# Altium PCB Cc and Cv.PcbDoc
Units mm, origin at the board's own origin, x right, y up, seen from the top; angles counter-clockwise.
Board outline 79.76 x 79.76 mm, 2 copper layers (Top Layer, Bottom Layer); 21 components, 17 nets, 64 pads, 0 vias.
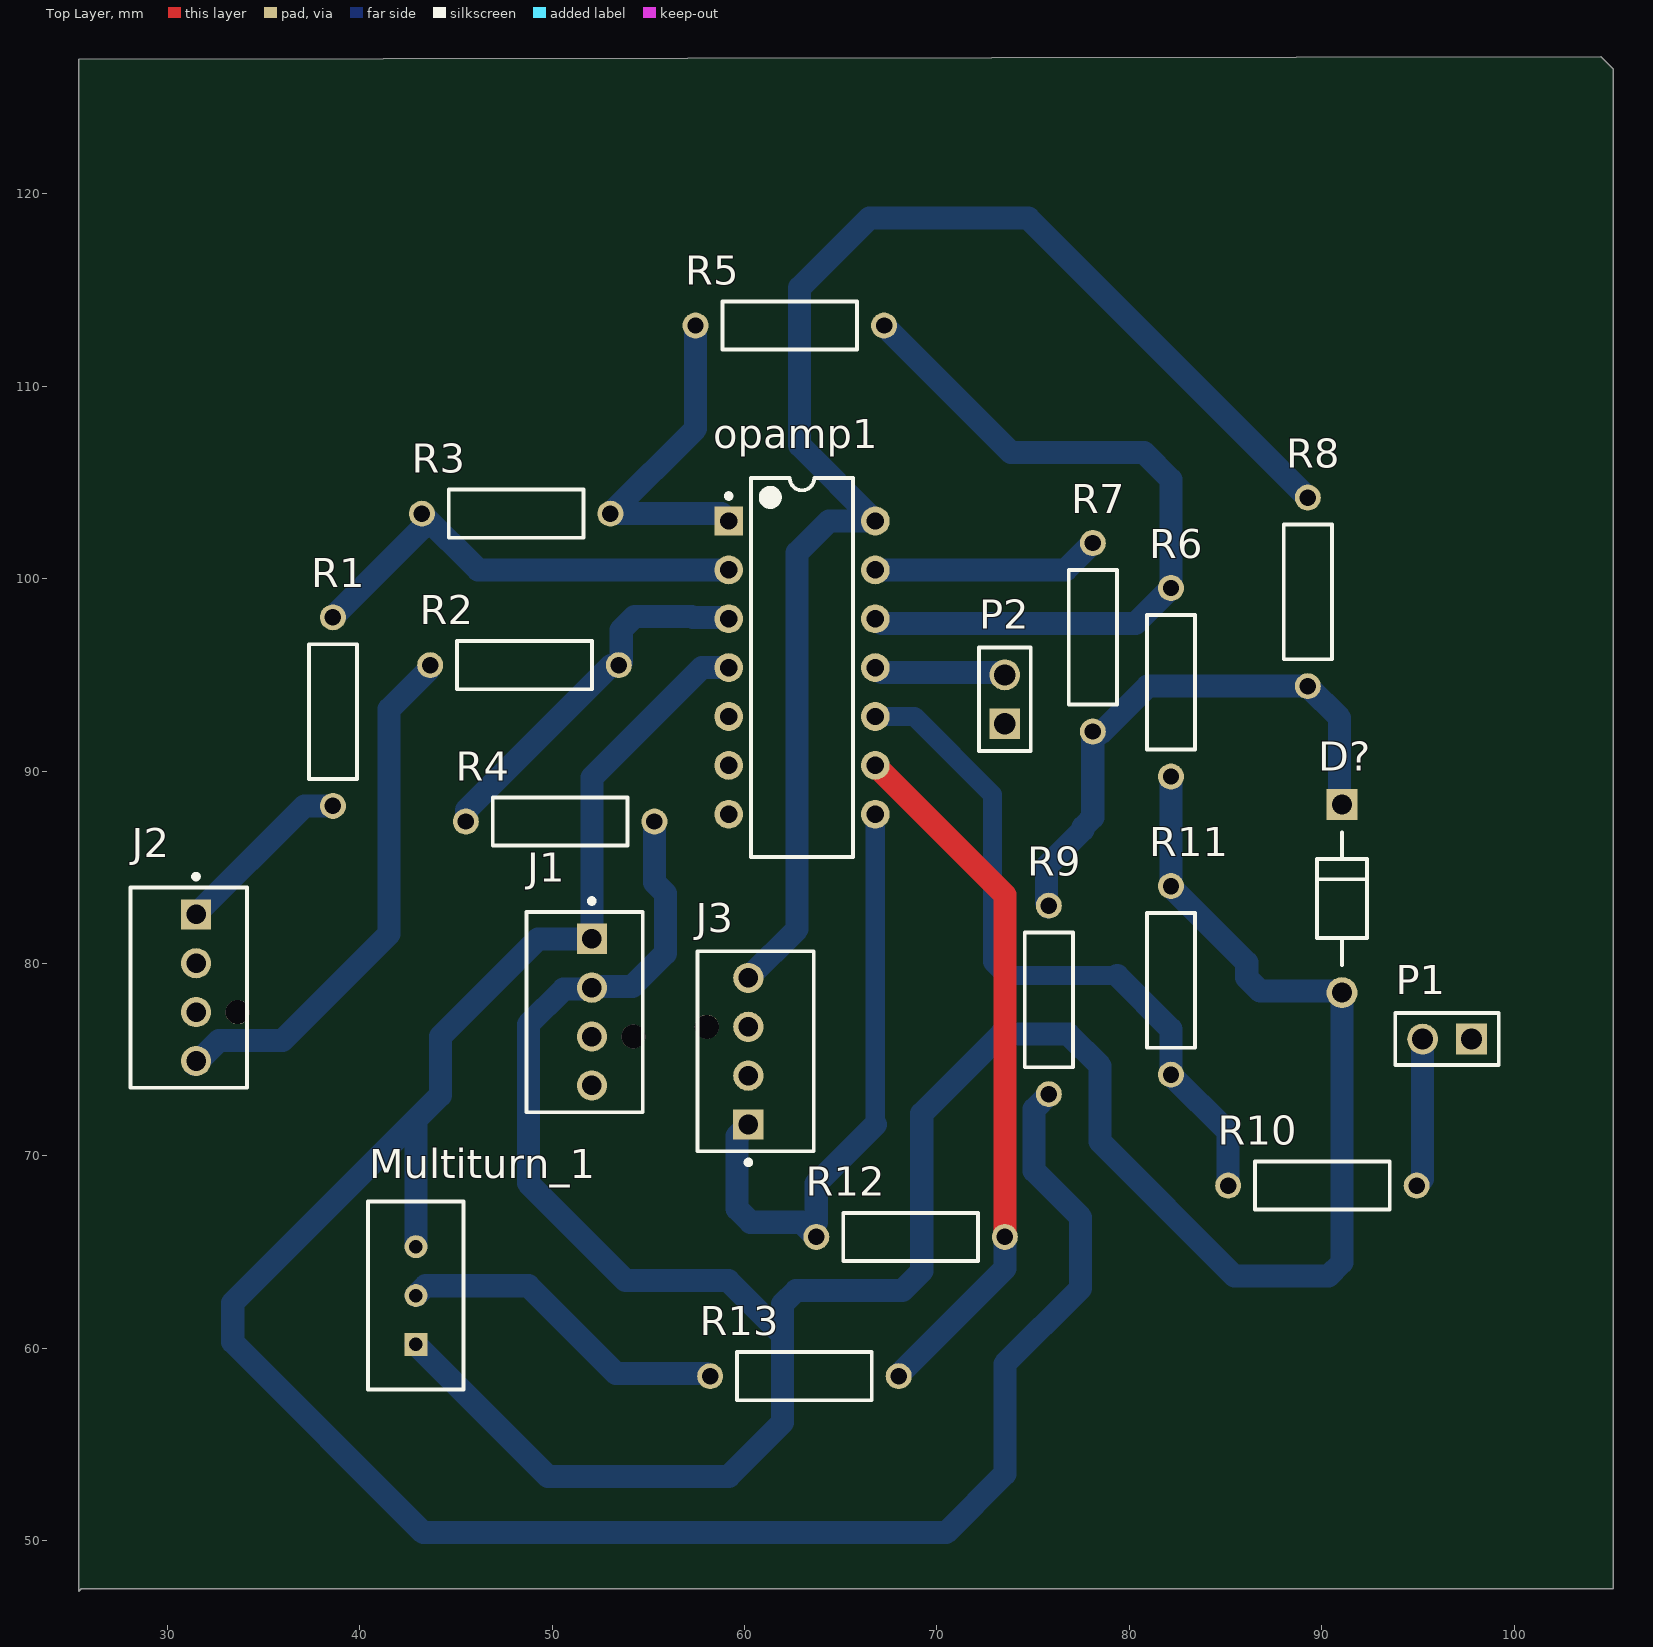
[diagram p0: Top Layer view]
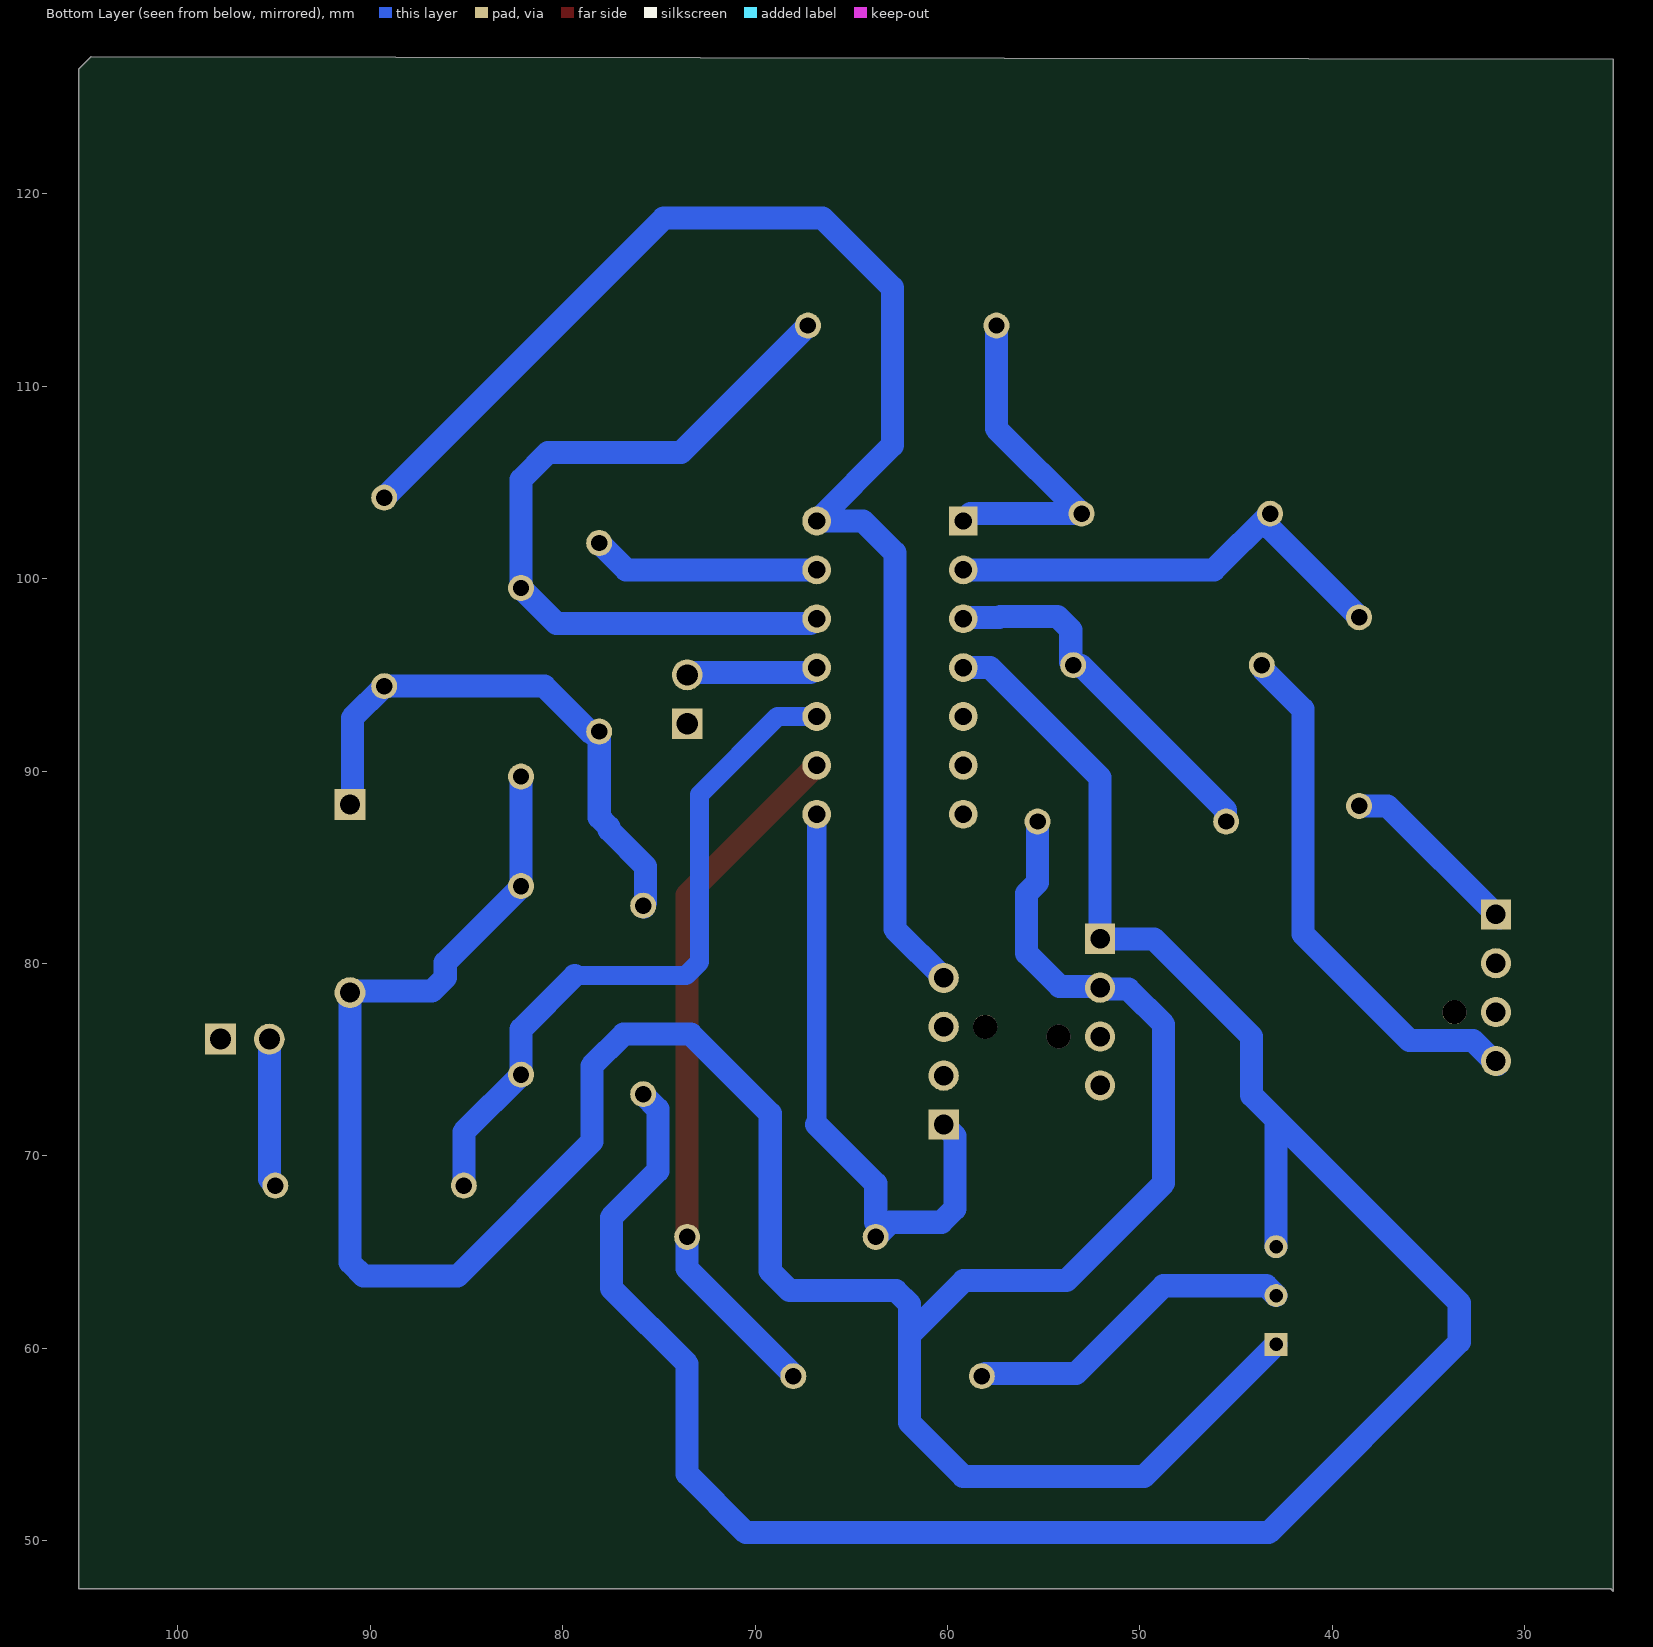
[diagram p1: Bottom Layer view, seen from below]

## Layer stack, top to bottom
Top Solder: solder mask 0.0102, Solder Resist, Dk 3.5
Top Layer: signal copper 0.0356
Dielectric 1: dielectric 0.32, FR-4, Dk 4.8
Bottom Layer: signal copper 0.0356
Bottom Solder: solder mask 0.0102, Solder Resist, Dk 3.5

## Board outline
25.4,127 25.4,47.371 25.527,47.498 105.156,47.498 105.156,126.492 104.521,127.127

## Design rules (kind name [scope] priority, off if disabled: settings)
Clearance [All] p1: gap=0.254 ignorepadtopadclearanceinfootprint=FALSE except(0: Arc-Hole Track-Hole SMDPad-Hole THPad-Hole Via-Hole Fill-Hole Poly-Hole Region-Hole Text-Hole)
PolygonConnect [All] p1: connectstyle=Relief reliefconductorwidth=0.254 reliefentries=4 polygonreliefangle="90 Angle" airgapwidth=0.254
RoomDefinition "Cc and Cv" [InComponentClass('Cc and Cv')] p1: confinementstyle=ConfineIn formatcopy=TRUE lockcomponents=FALSE outline 80.01,15.928 199.39,15.928 199.39,39.55 80.01,39.55
RoutingVias [All] p1: holewidth=0.711 width=1.27 viastyle="Through Hole" minholewidth=0.711 minwidth=1.27 maxholewidth=0.711 maxwidth=1.27
SolderMaskExpansion [All] p1: expansion=0.102 istentingtop=FALSE
Width [All] p1: maxlimit=1.5 minlimit=1.2 preferedwidth=1.5 minimp=50.000000 maximp=50.000000 favimp=50.000000
30 further rules are at their usual default settings.

## Components (designator, comment, footprint, x,y, rotation, side; value= is the part's Value field where it differs from the comment)
D? "" FP-6_561-5001_02-4-MFG 91.059,83.374 r270 top
J1 "" FP-47053-3000-MFG 51.69,77.47 r90 top
J2 "" FP-47053-3000-MFG 31.116,78.74 r90 top
J3 "" FP-47053-3000-MFG 60.579,75.438 r270 top
Multiturn_1 "" FP-3296W-MFG 42.921,62.738 r0 top
opamp1 "LM324N" N0014A 62.992,95.377 r0 top
P1 "" 61300211121 96.52,76.073 r180 top
P2 "" 61300211121 73.533,93.726 r90 top
R1 "1.2k" OMTE-RES7X2.5-2 38.608,93.091 r270 top
R2 "1.2k" OMTE-RES7X2.5-2 48.567,95.504 r180 top
R3 "1.2k" OMTE-RES7X2.5-2 48.133,103.378 r180 top
R4 "1.2k" OMTE-RES7X2.5-2 50.419,87.376 r180 top
R5 "1.2k" OMTE-RES7X2.5-2 62.357,113.157 r180 top
R6 "1.2k" OMTE-RES7X2.5-2 82.169,94.615 r270 top
R7 "1.2k" OMTE-RES7X2.5-2 78.105,96.954 r90 top
R8 "1.2k" OMTE-RES7X2.5-2 89.281,99.314 r90 top
R9 "1.2k" OMTE-RES7X2.5-2 75.819,78.105 r270 top
R10 "1.2k" OMTE-RES7X2.5-2 90.043,68.453 r0 top
R11 "1.2k" OMTE-RES7X2.5-2 82.169,79.121 r90 top
R12 "1.2k" OMTE-RES7X2.5-2 68.633,65.786 r0 top
R13 "1.2k" OMTE-RES7X2.5-2 63.119,58.547 r180 top

## Footprints (in the part's own frame and the unit in brackets; to place one, negate y for a bottom-side part, rotate by r counter-clockwise, add the part's x,y. Pads: shape width x height; smd on the part's side, far side on the other; paste and mask are expansions set on the pad)
61300211121 [mm] "Pin Header, pitch 2.54 mm, THT, Vertical, single row, 2p"
  rect 1.6x1.6 hole 1.1: 1(-1.27,0)
  round 1.6 hole 1.1: 2(1.27,0)
  silkscreen extent -2.69,-1.35 2.69,1.35, body extent -2.54,-1.27 2.54,1.27, height 8.57
FP-6_561-5001_02-4-MFG [mm]
  rect 1.6x1.6 hole 1.05 paste-1000 mask+0: 1(-4.888,0)
  round 1.6 hole 1.05 paste-1000 mask+0: 2(4.888,0)
  silkscreen extent -3.45,-1.3 3.45,1.3, body extent -5.79,-1.4 5.79,1.4, height 0.25
FP-3296W-MFG [mm]
  rect 1.2x1.2 hole 0.7 paste-1000 mask+0: 1(0.005,-2.54)
  round 1.2 hole 0.7 paste-1000 mask+0: 2(0.005,0) 3(0.005,2.54)
  silkscreen extent -2.48,-4.89 2.48,4.89, body extent -2.58,-4.99 2.58,4.99, height 0.25
FP-47053-3000-MFG [mm]
  rect 1.57x1.57 hole 1.02 paste-1000 mask+0: 1(3.81,-0.38)
  round 1.57 hole 1.02 paste-1000 mask+0: 2(1.27,-0.38) 3(-1.27,-0.38) 4(-3.81,-0.38)
  round 1.25 hole 1.25 unplated paste-1000 mask+0: ""(-1.27,-2.54)
  silkscreen extent -5.2,-3.02 5.9,3.02, body extent -5.3,-3.26 5.3,3.12, height 0.25
N0014A [mm] "DIP, 14-Leads, Body 19.7x6.6mm, Pitch 2.54mm"
  rect 1.5x1.5 hole 0.9: 1(-3.81,7.62)
  round 1.5 hole 0.9: 2(-3.81,5.08) 3(-3.81,2.54) 4(-3.81,0) 5(-3.81,-2.54) 6(-3.81,-5.08) 7(-3.81,-7.62) 8(3.81,-7.62) 9(3.81,-5.08) 10(3.81,-2.54) 11(3.81,0) 12(3.81,2.54) 13(3.81,5.08) 14(3.81,7.62)
  silkscreen extent -3.93,-9.85 2.65,9.85, body extent -3.95,-9.85 3.95,9.85, height 5.08
OMTE-RES7X2.5-2 [mm] "Resistor, Axial; Body 7x2.5mm, Lead Dia. 0.6mm"
  round 1.35 hole 0.85: 1(-4.9,0) 2(4.9,0)
  silkscreen extent -3.5,-1.25 3.5,1.25, body extent -3.5,-1.25 3.5,1.25, height 2.5

## Part data
D?: library part CMP-02541-000001-1, "DIODE ZENER 15V 1.3W DO41", Manufacturer=Vishay, Manufacturer Part Number=BZX85C15-TAP, Max Junction Temp=+175°C, Max Reverse Leakage Current=0.5uA, Max Zener Voltage=15.6V, Nom Zener Voltage=15V, Package=6.561-5001.02-4, Power Dissipation=1300mW, Reverse Voltage=11V, Temperature="to +175°C", Automotive=Yes, Automotive Grade="Grade 0", Category=Diode, ComponentLink2Description=Datasheet, ComponentLink2URL=http://www.vishay.com/docs/85607/bzx85.pdf, Device Class L1="Discrete Semiconductors", Device Class L2=Diodes, Device Class L3="Zener Diodes", Digikey Description="DIODE ZENER 15V 1.3W DO41", Height=2.6mm, Lead Free=Yes, Mouser Description="Zener Diodes 15 Volt 1.3 Watt 5%", Octopart=https://octopart.com/bzx85c15-tap-vishay-55401762, RoHS=TRUE, Temperature Range High=+175°C, Zener Impedance=15Ω
J1 J2 J3: library part CMP-04776-000447-1, "CONN HEADER VERT 4POS 2.54MM", Current Rating=4A, Max Operating Temperature=75°C, Min Operating Temperature=0°C, Package Quantity=12000, Voltage Rating=250V, Contact Material="Copper Alloy", Contact Plating=Tin, Gender=Male, Glow Wire Compliant=Non-compliant, Halogen Free="Low Halogen", Mount="Through Hole", Number of Circuits=4, Number of Contacts=4, Number of Positions=4, Number of Rows=1, Orientation=Straight, Packaging=Bulk, Pitch=2.54mm, REACH SVHC="No SVHC", RoHS Compliant=Yes, Series=47053, Termination="Through Hole"
Multiturn_1: library part CMP-07234-000043-1, "TRIMMER 50K OHM 0.5W PC PIN TOP", Color=Blue, Insulation Resistance=1GR, Manufacturer Series=3296, Max Operating Temperature=125°C, Max Power Dissipation=500mW, Min Operating Temperature=-55°C, Package Quantity=50, Resistance=50kR, Resistance Law=Linear, Resistance Tolerance=10%, Resistor Type=Cermet, Temperature Coefficient=100ppm/°C, Actuator Orientation=Vertical, Actuator Type=SCREW, Contact Plating=Tin, Depth=4.83mm, Height=0.395inch, Lead Free="Lead Free", Length=9.53mm, Military Standard=Not, Mount=Panel, Number of Pins=3, Number of Terminals/Pins=3, Number of Turns=25, Packaging=Rail/Tube, Power Rating=500mW, Radiation Hardening=No, REACH SVHC="No SVHC", RoHS Compliant=Yes, Series=3296, Taper=Linear, Technology=CERMET, Terminal Finish=Tin, Termination=Pin, Tolerance=10%, Type=Potentiometer, Weight=0.03oz, Width=9.53mm
opamp1: library part CMP-0055-00082-3, "Low Power Quad Operational Amplifier, 14-pin MDIP", Manufacturer="Texas Instruments", Package Reference=N0014A, PackageTopMarking=NSUZXYYTTE#*LM324N, PowerWise=N, Code_JEDEC=MS-001-AA, ComponentLink1Description="Datasheet URL", ComponentLink1URL=http://www.ti.com/general/docs/lit/getliterature.tsp?genericPartNumber=LM324&fileType=pdf, CompType=Amplifiers, PackageDescription="MDIP, .750 x .250 x.130in, 14 Lead, .100in Pitch", PinCount=14, RoHS=N
P1 P2: library part CMP-1712-00002-4, "THT Vertical Pin Header WR-PHD, Pitch 2.54 mm, Single Row, 2 pins", Contact Resistance=20mOhm, Manufacturer="Wurth Elektronik", Operating Temperature=-40to105degC, Package Reference=61300211121, Rated Current=3A, Withstanding Voltage=500VAC, Working Voltage=250VAC, Datasheet URL=https://katalog.we-online.de/em/datasheet/6130xx11121.pdf, Gender=Male, Manufacturer URL=http://www.we-online.de, Mounting Technology=THT, Orientation=Vertical, Packaging=Bag, Part Number=61300211121, Pin Number=2, Pitch=2.54mm, Publisher=WurthElektronik, Row Number=Single
R1 R2 R3 R4 R5 R6 R7 R8 R9 R10 R11 R12 R13: library part CMP-2000-06865-1, "Little Demon(R) Carbon Composition Molded OD Series, 250 V, 10 KOhm, +/-5%, -70 to 130 degC, 2-Pin THD, RoHS, Bulk", Manufacturer=Ohmite, Operating Temperature=-, Package / Case=Axial, Package Description="2-Pin THD Resistor, Body 7 x 2.5 mm, Lead Dia. 0.6 mm", Package Reference=RES7X2.5, PartNumber=OD103JE, Power (Watts)=0.25W,1/4W, Power Rating=0.25W, Resistance (Ohms)=10k, Standard Package=100, Tolerance=±5%, Catalog Drawings=OD,OF,OASeries, Category=Resistors, Composition=CarbonComposition, Datasheet URL=http://www.ohmite.com/cat/res_od_of_oa.pdf, Datasheet Version=06/2016, EDA / CAD Models=DownloadfromAcceleratedDesigns, Family=ThroughHoleResistors, Features=PulseWithstanding, Height=-, Manufacturer URL=http://www.ohmite.com/, Mounting Technology=ThroughHole, Number of Terminations=2, Online Catalog=OD,OF,OASeries,LittleDemon®, Packaging=Bulk, RoHS Information="LittleDemon\"E\"SeriesMaterialDeclaration", Series=LittleDemon®OD, Size / Dimension="0.098\"Diax0.276\"L(2.50mmx7.00mm)", Supplier Device Package=Axial, Temperature Coefficient=-

## Nets (pads, with @x,y where several pads share a name; then routed paths per layer and width w, separated by ;. In a path a pad name is that pad's centre, name@x,y a point inside that pad or via, vN(x,y) a via of type N, cw(c..) or ccw(c..) an arc to the next point about the centre after c; other vN are vias at no path point)
"+15 V": J1.1 Multiturn_1.3 opamp1.4 R9.2 | length 123
  Bottom Layer w1.2: Multiturn_1.3 42.926,71.882 ; opamp1.4 57.785,95.377 52.07,89.662 J1.1 49.276,81.28 44.196,76.2 44.196,73.152 42.926,71.882 ; R9.2 75.819,73.189 75.057,72.427 75.057,69.215 77.47,66.802 77.47,63.119 73.533,59.182 73.533,53.467 70.485,50.419 43.307,50.419 33.401,60.325 33.401,62.357 42.926,71.882
"-15 V": opamp1.11 P2.2 | length 7.1
  Bottom Layer w1.2: opamp1.11 66.883,95.377 67.137,95.123 P2.2@73.123,95.123 ; P2.2@73.348,95.073 73.174,95.073 P2.2@73.123,95.123 ; P2.2@73.533,95.123 P2.2@73.123,95.123
GND: D?.2 J1.2 Multiturn_1.1 R4.1 R6.2 R11.2 | length 148.6
  Bottom Layer w1.2: Multiturn_1.1 49.784,53.34 59.182,53.34 61.976,56.134 61.976,60.706 ; R4.1 55.319,84.218 55.891,83.646 55.891,80.529 54.173,78.811 52.141,78.811 51.999,78.669 50.602,78.669 48.768,76.835 48.768,68.58 53.828,63.52 59.162,63.52 61.976,60.706 ; R6.2 82.169,83.98 86.106,80.043 86.106,79.263 86.809,78.56 90.985,78.56 D?.2 91.059,64.457 90.356,63.754 85.471,63.754 78.486,70.739 78.486,74.676 76.835,76.327 73.347,76.327 69.215,72.195 69.215,64.008 68.204,62.997 62.679,62.997 61.976,62.294 61.976,60.706
NetD?_1: D?.1 R7.1 R8.1 R9.1 | length 28.7
  Bottom Layer w1.2: R9.1@75.784,82.942 75.79,82.949 75.79,83.074 75.692,83.173 75.692,85.037 77.597,86.942 77.597,87.087 78.105,87.595 R7.1 ; R7.1@78.486,91.948 80.952,94.414 R8.1 90.932,92.763 D?.1@90.932,88.365
NetJ2_1: J2.1 R1.2 | length 9.7
  Bottom Layer w1.2: J2.1@31.311,82.365 37.137,88.191 R1.2
NetJ2_4: J2.4 R2.2 | length 27.7
  Bottom Layer w1.2: J2.4@31.425,74.759 31.781,75.115 31.808,75.115 32.684,75.991 35.986,75.991 41.529,81.534 41.529,93.218 43.638,95.327 43.638,95.435 R2.2@43.659,95.455
NetJ3_1: J3.1 opamp1.8 R12.1 | length 31.8
  Bottom Layer w1: 66.802,71.628 opamp1.8
  Bottom Layer w1.2: J3.1 59.613,71.042 59.613,67.251 60.316,66.548 62.955,66.548 63.717,65.786 R12.1 ; 63.733,66.548 63.733,68.559 66.802,71.628
NetJ3_4: J3.4 opamp1.14 R8.2 | length 75.6
  Bottom Layer w1.2: J3.4 62.738,81.787 62.738,101.346 64.389,102.997 opamp1.14 62.865,106.934 62.865,115.121 66.489,118.745 74.75,118.745 R8.2
NetMultiturn_1_2: Multiturn_1.2 R13.2 | length 17.4
  Bottom Layer w1.2: Multiturn_1.2 43.434,63.246 48.768,63.246 53.318,58.696 58.029,58.696 58.15,58.576 R13.2@58.19,58.616
Netopamp1_1: opamp1.1 R3.1 R5.2 | length 17.9
  Bottom Layer w1.2: R5.2 57.457,107.802 R3.1 58.801,103.378 opamp1.1
Netopamp1_2: opamp1.2 R1.1 R3.2 | length 23.7
  Bottom Layer w1.2: R1.1 43.204,102.587 ; R3.2 46.154,100.457 opamp1.2
Netopamp1_3: opamp1.3 R2.1 R4.2 | length 19.4
  Bottom Layer w1.2: R4.2 45.548,87.405 45.548,87.966 53.057,95.475 53.438,95.475 R2.1 ; R2.1@53.496,95.545 53.496,95.573 53.594,95.672 53.594,97.341 54.297,98.044 57.255,98.044 57.325,97.974 59.125,97.974 opamp1.3
Netopamp1_9: opamp1.9 R12.2 R13.1 | length 36.9
  Top Layer w1.2: opamp1.9 73.533,83.566 R12.2
  Bottom Layer w1.2: opamp1.9 opamp1.9@66.859,90.24 ; R13.1 68.048,58.576 68.048,58.65 73.533,64.135 R12.2
Netopamp1_10: opamp1.10 R10.1 R11.1 | length 36.5
  Bottom Layer w1: opamp1.10@66.883,92.837 68.834,92.837 72.898,88.773 72.898,80.078 73.601,79.375 79.375,79.375
  Bottom Layer w1.2: 79.375,79.375 82.169,76.581 R11.1 85.143,71.247 R10.1
Netopamp1_12: opamp1.12 R5.1 R6.1 | length 40.1
  Bottom Layer w1.2: opamp1.12 66.883,97.917 67.137,97.663 80.317,97.663 R6.1 82.169,105.156 80.772,106.553 73.861,106.553 R5.1
Netopamp1_13: opamp1.13 R7.2 | length 11.7
  Bottom Layer w1.2: opamp1.13@66.883,100.457 76.708,100.457 R7.2@78.056,101.805
NetP1_2: P1.2 R10.2 | length 7.7
  Bottom Layer w1.2: R10.2 94.943,68.494 95.25,68.801 P1.2
pads on no net: J1. J1.3 J1.4 J2. J2.2 J2.3 J3. J3.2 J3.3 opamp1.5 opamp1.6 opamp1.7 P1.1 P2.1